# Altium PCB MB1075.PcbDoc (part 3 of 4)
Units mm, origin at the board's own origin, x right, y up, seen from the top; angles counter-clockwise.
Board outline 66 x 119.3 mm, 4 copper layers (TOP, L2, L3, Bottom), stack 1.548 mm thick; 196 components, 219 nets, 897 pads, 500 vias.
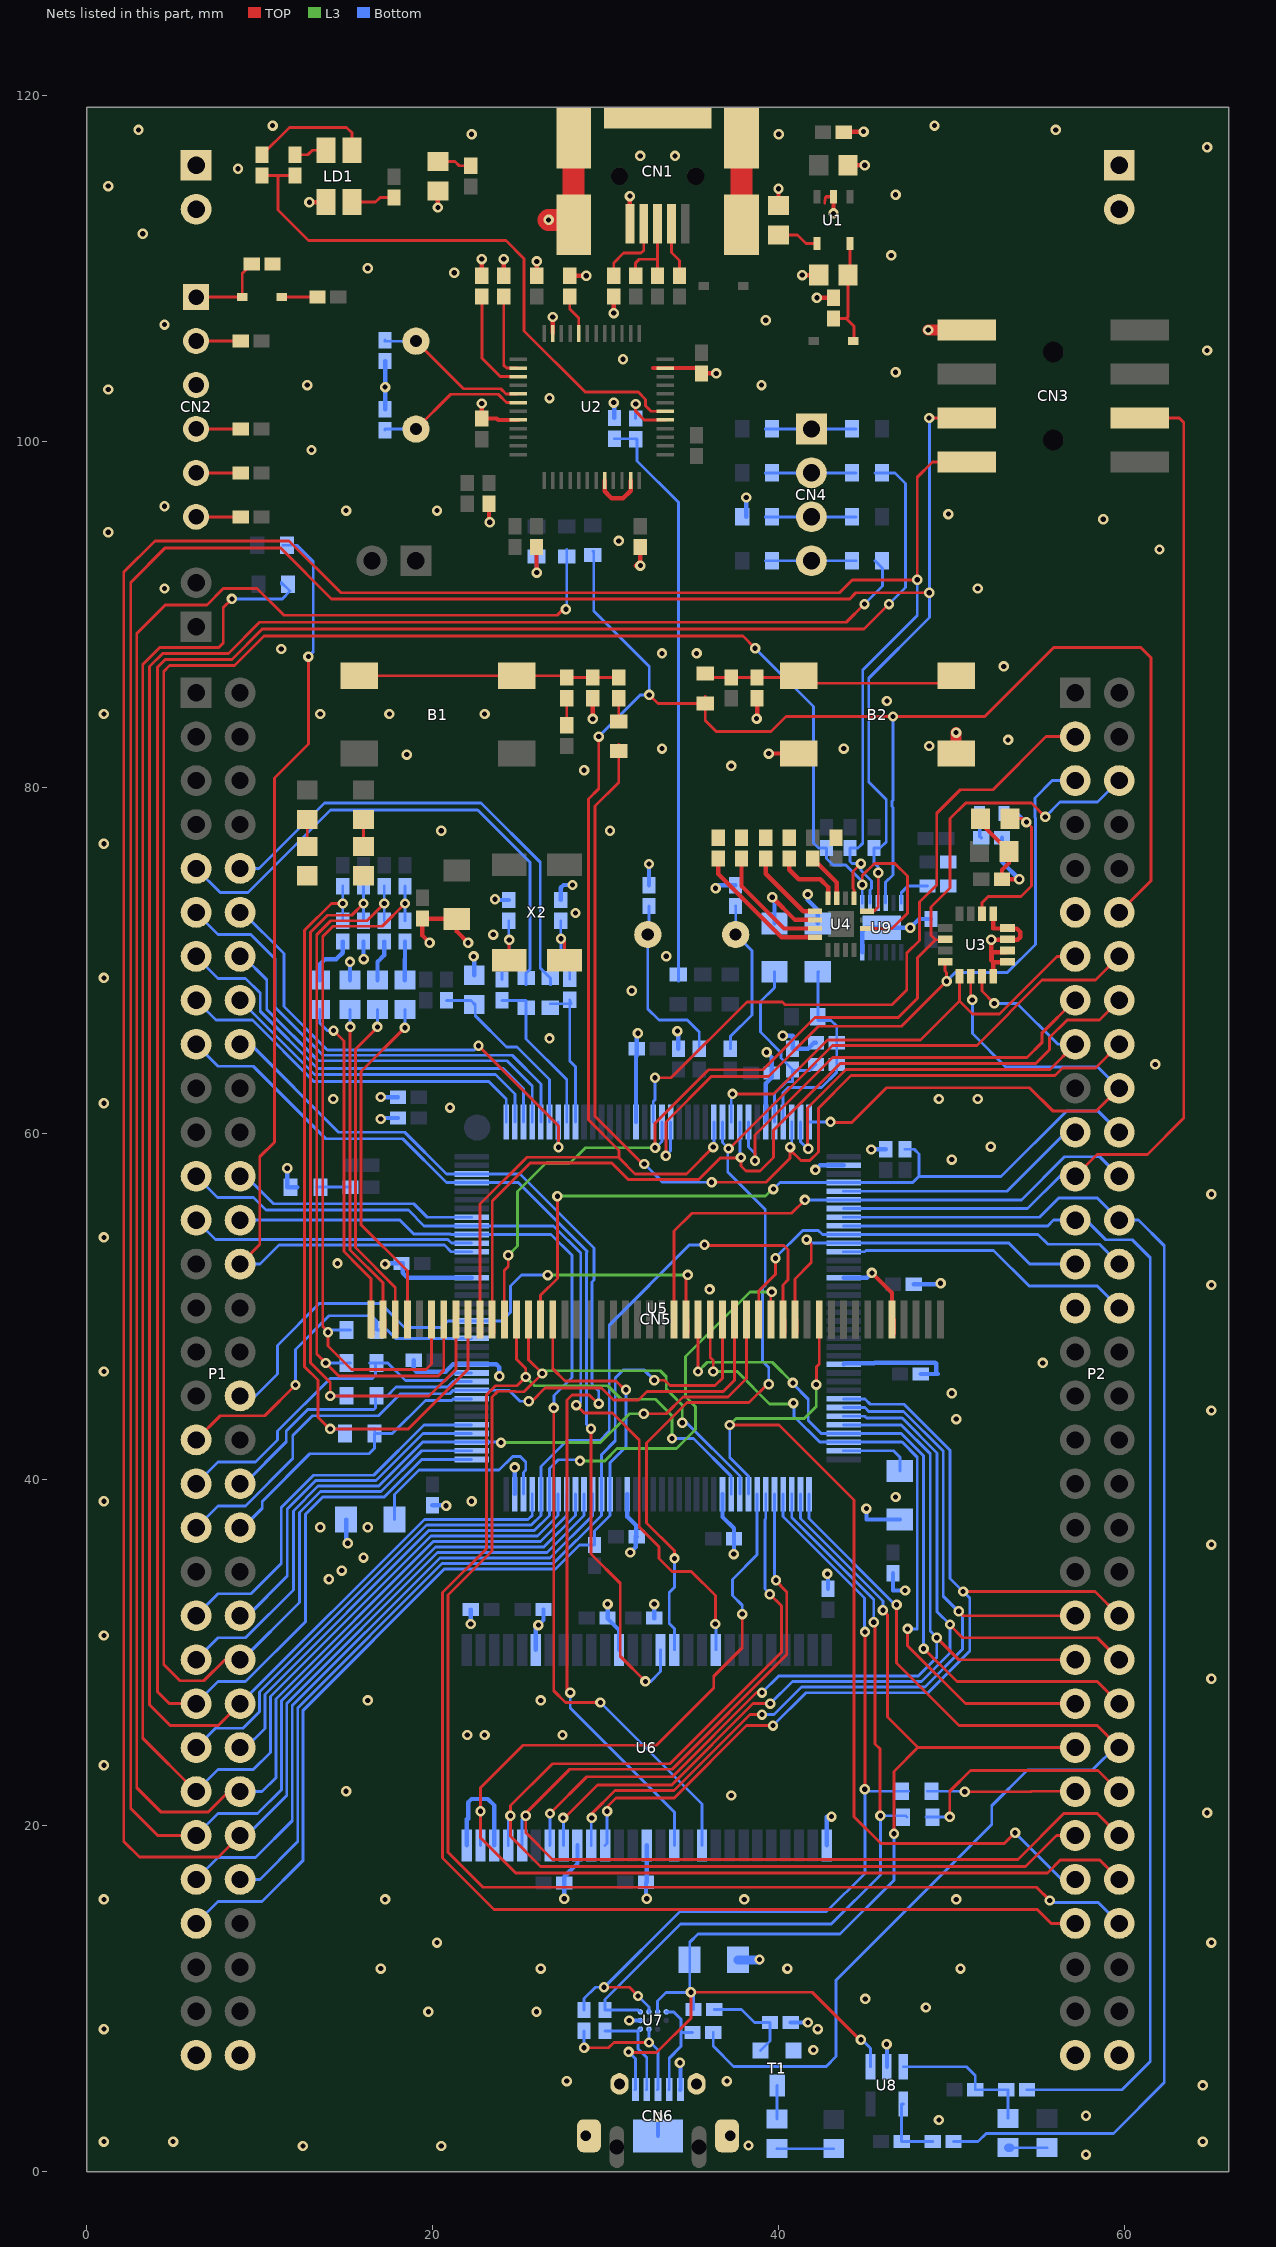
[diagram p4: the nets of this part, all layers, seen from the top]

## Via types
v1: diameter 0.6, hole 0.3, TOP to Bottom, 375 vias
v2: diameter 0.6, hole 0.3, TOP to Bottom, tented both sides, 125 vias

## Nets (pads, with @x,y where several pads share a name; then routed paths per layer and width w, separated by ;. In a path a pad name is that pad's centre, name@x,y a point inside that pad or via, vN(x,y) a via of type N, cw(c..) or ccw(c..) an arc to the next point about the centre after c; other vN are vias at no path point) (continued)
D9: P2.44 U5.65 U6.44 | length 56
  TOP w0.165: v1(30.079,20.837) 30.079,21.091 30.6,21.612 33.963,21.612 38.14,25.79 v1(39.668,25.79) ; v1(50.653,33.537) 58.273,33.537 P2.44@59.67,32.14
  Bottom w0.165: U6.44@29.965,18.87 30.079,18.984 v1(30.079,20.837) ; v1(39.668,25.79) 41.566,27.688 48.614,27.688 51.034,30.108 51.034,33.156 v1(50.653,33.537) 49.9,34.29 49.9,41.7 47.236,44.364 45.289,44.364 44.983,44.67 U5.65@43.75,44.67
D10: P2.43 U5.66 U6.45 | length 52.8
  TOP w0.165: v1(29.19,20.456) 29.19,20.701 30.526,22.037 33.942,22.037 38.33,26.425 v1(39.033,26.425) ; v1(50.399,32.394) 50.653,32.14 P2.43@57.13,32.14
  Bottom w0.165: U6.45@29.165,18.87 29.165,20.431 v1(29.19,20.456) ; v1(39.033,26.425) 39.717,26.425 41.319,28.028 48.446,28.028 50.621,30.203 50.621,32.172 v1(50.399,32.394) 50.367,32.394 49.5,33.261 49.5,41.65 47.199,43.951 45.202,43.951 44.983,44.17 U5.66@43.75,44.17
D11: P2.46 U5.67 U6.47 | length 56.7
  TOP w0.165: v1(27.539,20.456) 27.62,20.456 29.516,22.353 33.812,22.353 38.519,27.06 v1(39.509,27.06) ; v1(49.891,31.632) 49.891,31.6 50.621,30.87 58.4,30.87 P2.46@59.67,29.6
  Bottom w0.165: v1(27.539,20.456) 27.565,20.456 U6.47@27.565,18.87 ; v1(39.509,27.06) 40.792,28.343 48.253,28.343 49.891,29.981 v1(49.891,31.632) 49.15,32.373 49.15,41.55 47.13,43.57 45.065,43.57 44.965,43.67 U5.67@43.75,43.67
D12: P2.45 U5.68 U6.48 | length 54.1
  TOP w0.165: v1(26.777,20.71) 26.809,20.71 26.809,20.743 28.901,22.836 33.849,22.836 38.708,27.695 v1(39.033,27.695) ; v1(49.129,30.87) 50.399,29.6 P2.45@57.13,29.6
  Bottom w0.165: U6.48@26.765,18.87 26.777,18.882 v1(26.777,20.71) ; v1(39.033,27.695) 39.996,28.659 48.061,28.659 49.129,29.727 v1(49.129,30.87) 48.75,31.249 48.75,41.5 47.08,43.17 U5.68@43.75,43.17
D13: P2.54 U5.77 U6.50 | length 68
  TOP w0.165: v1(39.842,34.188) 39.796,34.188 40.463,33.52 40.463,29.895 33.84,23.272 27.925,23.272 25.38,20.728 v1(25.38,20.583) 25.38,19.607 26.93,18.057 53.816,18.057 56.469,20.71 58.4,20.71 P2.54@59.67,19.44
  Bottom w0.165: U6.50@25.165,18.87 25.165,20.368 v1(25.38,20.583) ; U5.77@39.75,39.17 39.75,34.188 v1(39.842,34.188)
D14: P2.53 U5.78 U6.51 | length 66.5
  TOP w0.165: v1(39.473,33.386) 40.148,32.712 40.148,30.025 33.71,23.588 26.915,23.588 24.491,21.164 v1(24.491,20.583) 24.491,19.393 26.226,17.658 54.263,17.658 56.045,19.44 P2.53@57.13,19.44
  Bottom w0.165: U6.51@24.365,18.87 24.365,20.457 v1(24.491,20.583) ; U5.78@39.25,39.17 39.25,37.755 39.198,37.703 39.198,33.676 39.473,33.402 v1(39.473,33.386)
D15: P2.56 U5.79 U6.53 | length 72
  TOP w0.165: v1(37.886,32.235) 37.886,30.286 36.245,28.646 36.245,27.958 32.942,24.655 25.219,24.655 22.765,22.201 v1(22.765,20.837) 22.765,19.313 24.801,17.277 55.523,17.277 56.268,18.022 58.548,18.022 P2.56@59.67,16.9
  Bottom w0.165: U6.53@22.765,18.87 v1(22.765,20.837) ; v1(37.886,32.235) 37.886,32.743 37.325,33.304 37.325,34.24 38.75,35.664 38.75,37.763 U5.79@38.75,39.17
G2: CN5.23 P2.24 U5.42 | length 33.9
  TOP w0.165: CN5.23@33.939,49.256 33.939,54.363 34.976,55.4 40.739,55.4 v1(41.509,56.17) ; CN5.23@34.05,48.43 CN5.23@34.05,49.256
  Bottom w0.165: v1(41.509,56.17) 54.018,56.17 56.51,58.662 58.548,58.662 P2.24@59.67,57.54
G3: CN5.22 P1.34 U5.125 | length 35.2
  TOP w0.165: CN5.22@34.639,49.256 34.639,51.732 v1(34.743,51.835) ; CN5.22@34.75,48.43 CN5.22@34.75,49.256
  L3 w0.165: v1(26.65,51.825) 31.483,51.825 ; 31.483,51.825 34.743,51.825 v1(34.743,51.835)
  Bottom w0.165: P1.34@8.87,44.84 9.759,44.84 11.029,46.11 11.029,47.761 13.442,50.174 16.998,50.174 18.371,48.801 20.514,48.801 20.883,49.17 U5.125@22.25,49.17 23.983,49.17 24.491,49.678 24.491,51.19 25.126,51.825 v1(26.65,51.825)
G4: CN5.21 P2.48 U5.69 | length 43
  TOP w0.165: v1(35.331,46.253) 35.339,46.261 CN5.21@35.339,49.256 ; v1(48.367,30.235) 48.399,30.235 50.304,28.33 58.4,28.33 P2.48@59.67,27.06
  L3 w0.165: v1(35.331,46.253) 35.864,46.786 39.624,46.786 v1(40.813,45.596)
  Bottom w0.165: v1(40.813,45.596) 40.813,45.541 41.704,44.65 41.704,43.421 42.455,42.67 47.08,42.67 48.367,41.383 v1(48.367,30.235)
G5: CN5.20 P2.47 U5.70 | length 39.9
  TOP w0.165: CN5.20@36.039,49.256 36.039,47.066 36.213,46.892 v1(36.213,46.253) ; v1(47.446,31.378) 47.446,30.403 50.789,27.06 P2.47@57.13,27.06
  L3 w0.165: v1(36.213,46.253) 37.597,46.253 39.469,44.381 40.798,44.381 v1(40.846,44.429)
  Bottom w0.165: v1(40.846,44.429) 40.884,44.391 40.884,43.653 42.367,42.17 47.13,42.17 48,41.3 48,31.378 v1(47.446,31.378)
G6: CN5.19 P1.56 U5.97 | length 52.7
  TOP w0.165: v1(32.809,45.745) 33.396,45.745 33.705,45.436 36.322,45.436 36.746,45.86 36.746,49.249 CN5.19@36.739,49.256
  Bottom w0.165: P1.56@8.87,16.9 10.013,16.9 12.201,19.088 12.201,26.813 20.544,35.156 26.969,35.156 29.75,37.937 U5.97@29.75,39.17 29.75,41.446 30.553,42.248 30.553,45.885 31.025,46.357 32.197,46.357 v1(32.809,45.745)
G7: CN5.18 P1.39 U5.117 | length 40
  TOP w0.165: v1(25.55,44.534) 25.734,44.534 26.5,45.3 29.75,45.3 30.45,44.6 31.9,44.6 32.39,45.09 36.017,45.09 36.441,45.09 36.444,45.087 36.776,45.087 37.439,45.75 CN5.18@37.439,49.256
  Bottom w0.165: P1.39@6.33,37.22 7.6,38.49 9.186,38.49 11.918,41.222 11.918,42.554 13.061,43.697 16.871,43.697 18.141,44.967 20.986,44.967 21.189,45.17 U5.117@22.25,45.17 24.415,45.17 25.051,44.534 v1(25.55,44.534)
GND: B2.2 B2.3 C1.1 C2.1 C3.1 C4.1 C5.2 C6.1 C7.1 C8.1 C9.1 C10.1 C12.1 C13.1 C14.2 C15.1 C16.2 C17.2 C18.1 C19.1 C20.2 C21.2 C22.1 C23.2 C24.2 C25.2 C26.2 C27.1 C28.1 C29.1 C30.2 C31.1 C32.1 C33.1 C34.1 C35.1 C36.1 C37.1 C38.1 C39.1 C40.1 C41.2 C42.2 C43.1 C44.1 C45.1 C46.1 C47.1 C48.1 C49.1 C50.1 C51.1 C52.1 C53.2 C55.2 CN1.5 CN1.6 CN2.3 CN3.7 CN5.5 CN6.5 CN6.6 CN6.7 CN6.8 CN6.9 CN6.10 JP1.1 JP1.2 JP2.1 JP2.2 LD1.1 LD2.2 LD3.2 LD4.2 P1.63 P1.64 P2.11 P2.29 P2.63 P2.64 R5.2 R6.1 R7.1 R8.1 R9.2 R19.1 R22.1 R32.2 R33.2 R34.2 R40.1 R41.1 R42.1 R43.1 R44.1 R46.2 R47.1 R48.1 R49.1 R50.1 R55.2 R66.2 R74.1 R75.1 SB7.2 SB10.1 SB21.1 T1.2 U1.2 U2.8 U2.20 U2.23 U2.35 U2.47 U3.8 U3.9 U3.10 U3.11 U3.12 U3.13 U4.10 U5.16 U5.31 U5.38 U5.51 U5.61 U5.83 U5.94 U5.107 U5.120 U5.130 U6.6 U6.12 U6.28 U6.41 U6.46 U6.52 U6.54 U7.D2 U8.2 U9.6 U9.13 | length 196.3
  TOP w0.15: 42.667,113.764 42.667,113.92 42.685,113.938 42.685,114.067 42.747,114.129
  TOP w0.21: 42.753,114.135 U1.2@43.16,114.135
  TOP w0.25: v1(12.876,113.825) LD1.1@13.835,113.825 ; v1(19.824,71.034) 19.406,71.452 C15.1@19.406,72.425 21.378,72.425 C14.2@21.4,72.403 21.4,71.68 v1(22.046,71.034) ; v1(20.3,113.516) LD2.2@20.3,114.475 ; v1(22.84,102.191) C8.1@22.84,101.32 23.703,101.32 23.783,101.24 U2.8@24.94,101.24 ; R6.1@22.84,109.575 v1(22.84,110.534) ; R19.1@23.25,96.4 23.25,95.331 v1(23.3,95.331) ; R7.1@24.11,109.575 v1(24.11,110.534) ; C9.1@26,93.9 26,92.745 26.015,92.73 26.015,92.416 v1(26.009,92.416) ; C4.1@26.015,109.575 v1(26.015,110.4) ; v1(26.937,107.191) 26.94,107.191 U2.47@26.94,106.24 ; R8.1@27.92,109.575 v1(28.879,109.575) ; R22.1@29.25,85.15 29.25,83.962 v1(29.255,83.962) ; U2.20@29.94,97.74 29.94,97.117 30.341,96.716 31.002,96.716 31.44,97.154 U2.23@31.44,97.74 ; v1(30.46,107.416) R9.2@30.46,108.375 ; CN1.5@31.397,112.575 v1(31.397,114.176) ; C10.1@32,93.9 32,92.931 31.85,92.931 31.742,92.823 v1(32.001,92.823) ; 32.742,104.24 U2.35@33.44,104.24 35.23,104.24 C7.1@35.54,103.93 v1(36.391,103.93) ; v1(38.719,83.98) 38.75,83.98 C12.1@38.75,85.15 ; v1(39.422,81.961) 39.423,81.96 B2.2@41.15,81.96 ; v1(39.627,73.659) 40.936,72.35 U4.10@42.1,72.35 ; C3.1@39.985,113.635 v1(39.985,114.594) ; v1(41.351,109.61) C5.2@42.31,109.61 ; v1(42.201,108.305) C6.1@43.16,108.305 ; v1(43.16,113.176) U1.2@43.16,114.135 ; C1.1@43.835,117.9 v1(44.9,117.9) ; C2.1@44.01,115.96 v1(44.969,115.96) ; v1(45.383,51.952) 46.539,50.795 CN5.5@46.539,49.256 ; CN5.5@46.65,48.43 CN5.5@46.65,49.256 ; C19.1@51.65,78.2 51.65,77.95 C13.1@53.3,76.3 53.3,75.64 52.9,75.24 C48.1@52.9,74.7 v1(53.9,74.7) ; U3.8@52.389,69.075 52.389,69.9 ; U3.13@52.39,72.675 52.39,71.85 53.215,71.85 53.75,71.85 53.95,71.65 53.95,71.35 53.8,71.2 v1(52.28,71.2) 52.28,70.1 ; U3.9@53.215,69.9 52.389,69.9 ; U3.10@53.215,70.55 53.152,70.487 52.3,70.487 52.3,70.1 52.28,70.1 ; 52.28,70.1 52.28,70.019 52.389,69.91 52.389,69.9
  TOP w0.635: v1(48.635,106.435) CN3.7@50.86,106.435 ; v1(50.249,83.17) 50.25,83.17 B2.3@50.25,81.96
  TOP w1.27: v1(26.7,112.8) CN1.6@28.147,112.8 ; CN1.6@28.147,112.525 CN1.6@28.147,112.8 ; CN1.6@28.147,117.525 CN1.6@28.147,112.8 ; CN1.6@37.847,112.525 CN1.6@37.847,117.525
  Bottom w0.25: v1(11.6,58) 11.6,56.905 SB21.1@12.18,56.905 ; R47.1@13.474,68.868 13.474,69.764 13.791,70.081 14.426,70.081 14.8,70.455 R41.1@14.8,71.1 ; C42.2@15.003,37.7 15.003,36.331 v1(15.093,36.331) ; R48.1@15.22,68.868 v1(15.22,69.922) ; R42.1@16,71.1 16,70.081 v1(16.014,70.081) ; R49.1@16.808,68.868 16.808,69.922 17.2,70.315 R43.1@17.2,71.1 ; v1(16.998,60.842) 16.998,60.9 C34.1@18,60.9 ; v1(16.998,62.112) 16.998,62.1 C33.1@18,62.1 ; C17.2@17.25,101.85 v1(17.25,103.136) C16.2@17.25,104.65 ; v1(17.252,52.46) 17.252,52.5 C36.1@18.2,52.5 18.268,52.5 18.268,51.952 18.55,51.67 U5.130@22.25,51.67 ; R50.1@18.395,68.868 18.395,70.081 18.4,70.081 R44.1@18.4,71.1 ; C38.1@18.906,46.904 18.906,46.393 19.053,46.246 20.754,46.246 21.178,46.67 U5.120@22.25,46.67 23.677,46.67 23.856,46.491 v1(23.856,45.983) ; C40.1@19.983,38.525 20.776,38.525 v1(20.776,38.49) ; U6.54@21.965,18.87 21.965,20.392 22.046,20.392 22.046,21.352 22.247,21.553 23.184,21.553 23.565,21.173 U6.52@23.565,18.87 ; C46.1@22.2,32.5 22.2,31.664 v1(22.205,31.664) ; v1(22.364,70.24) 22.4,70.24 C28.1@22.4,69.15 ; v1(23.602,73.542) 23.602,73.5 C23.2@24.4,73.5 ; v1(24.745,40.712) 24.75,40.712 U5.107@24.75,39.17 ; U6.6@25.965,30.17 25.965,31.505 26.015,31.505 v1(26.11,31.6) 26.4,31.89 C47.1@26.4,32.5 ; SB10.1@26,93.75 26,92.416 v1(26.009,92.416) ; C24.2@27.4,73.5 27.4,74.209 27.559,74.367 v1(28.079,74.367) ; v1(27.603,15.789) 27.6,15.789 C51.1@27.6,16.7 27.6,17.056 28.365,17.821 U6.46@28.365,18.87 ; v1@30.107,32.812 30.107,31.981 30.765,31.324 U6.12@30.765,30.17 ; v1(30.46,102.24) 30.46,102.229 30.5,102.189 C18.1@30.5,101.35 ; U5.94@31.25,39.17 31.25,37.859 31.763,37.346 C43.1@31.763,36.737 ; v1(31.357,8.75) U7.D2@32,8.75 ; v1(31.413,35.791) 31.73,36.109 31.73,36.718 31.756,36.744 C43.1@31.763,36.737 ; U5.16@31.75,60.67 31.75,64.464 31.8,64.514 C29.1@31.8,64.9 31.8,65.795 v1(31.857,65.795) ; C43.1@31.8,36.7 C43.1@31.763,36.737 ; v1(32.365,15.789) 32.33,15.789 C52.1@32.33,16.741 32.365,16.741 U6.41@32.365,18.87 ; C20.2@32.5,74.35 v1@32.5,75.582 ; C27.1@32.806,31.981 v1(32.806,32.812) ; CN6.10@33.02,2.085 v1(33.02,3.175) ; v1(34.143,65.922) 34.2,65.922 R55.2@34.2,64.9 ; v1(34.288,6.309) 34.32,6.278 CN6.5@34.32,4.76 ; CN6.5@34.3,4.75 CN6.5@34.3,4.76 ; v1(36.347,74.174) 36.523,74.35 C21.2@37.5,74.35 ; U5.83@36.75,39.17 36.75,37.85 37.41,37.19 C44.1@37.41,36.585 37.41,35.7 v1(37.4,35.7) ; SB7.2@38.115,95.64 v1(38.115,96.755) ; U5.31@39.25,60.67 39.25,62.902 39.6,63.252 39.6,64.398 v1(39.298,64.7) ; C25.2@39.75,72.147 39.75,73.347 ; v1(40.229,65.653) 40.8,65.653 C30.2@40.8,64.9 41.687,64.9 42.037,65.25 C31.1@42.15,65.25 ; R66.2@40.693,8.633 v1(41.681,8.633) ; v1(41.675,73.824) 41.675,73.496 42.25,72.922 C26.2@42.25,72.147 ; v1(42.114,57.904) 42.381,58.17 U5.38@43.75,58.17 ; U6.28@42.765,18.87 42.765,20.53 v1(43.045,20.53) ; v1(42.809,34.56) 42.843,34.56 C50.1@42.843,33.692 ; U5.61@43.75,46.67 43.804,46.724 45.512,46.724 45.554,46.766 49.045,46.766 49.098,46.713 49.098,46.204 49.193,46.11 C39.1@48.205,46.11 ; U5.51@43.75,51.67 45.1,51.67 v1(45.383,51.952) ; U9.6@44.825,70.475 44.825,71.682 45.043,71.9 v1(47.6,71.9) 48.1,72.4 C55.2@48.797,72.4 ; v1(45.065,38.331) 45.065,37.703 C41.2@47,37.703 ; v1(45.345,59.081) 45.345,59.093 C35.1@46.176,59.092 ; v1(46.232,7.378) 46.25,7.378 U8.2@46.25,6.075 ; C45.1@46.6,34.6 46.6,33.6 v1(47.3,33.6) ; C37.1@47.8,51.3 49.351,51.3 v1(49.351,51.349) ; R75.1@52.9,77.1 52.9,75.7 v1(53.9,74.7)
  Bottom w0.5: C53.2@37.647,12.25 38.886,12.25 v1(38.886,12.277)
  other v1: 41.998,7.046 30.107,32.812 32.5,75.582 18.5,81.9 48.7,82.4
  other v2: 57.75,1 12.5,1.5 20.5,1.5 38.25,1.524 1,1.75 5,1.75 64.5,1.75 49.25,3 57.75,3.25 64.5,5 27.75,5.25 37,5.25 1,8.25 42.25,8.25 19.75,9.25 26,9.25 48.5,9.5 45,10 17,11.75 26.25,11.75 40.5,11.75 50.5,11.75 20.25,13.25 65,13.25 1,15.75 17.25,15.75 38,15.75 50.25,15.75 64.75,20.75 37.25,21.75 15,22 1,23.5 22,25.25 23,25.25 27.5,25.25 16.25,27.25 26.25,27.25 65,28.5 1,31 14,34.25 14.75,34.75 16,35.5 65,36.25 13.5,37.25 16.25,37.25 1,38.75 22.25,38.75 46.75,39 50.25,43.5 65,44 50,45 1,46.25 55.25,46.75 36,51 65,51.25 14.5,52.5 1,54 65,56.5 50,58.5 52.25,59.25 21,61.5 1,61.75 14.25,62 49.25,62 51.5,62 61.75,64 26.75,65.5 31.5,68.25 1,69 33.5,70.25 23.5,71.5 28.25,72.75 1,76.75 20.5,77.5 30.25,77.5 28.75,81 37.25,81.25 33.25,82.25 43.75,82.25 53.25,82.75 1,84.25 13.5,84.25 17.5,84.25 23,84.25 46.25,85 53,87 33.25,87.75 35.25,87.75 11.25,88 4.5,91.5 51.5,91.5 62,93.75 30.75,94.25 1.25,94.75 58.75,95.5 49.8,95.8 15,96 20.25,96 4.5,96.25 13,99.5 26.75,102.5 1.25,103 12.75,103.25 39,103.25 46.75,104 31,104.75 64.75,105.25 4.5,106.75 39.25,107 21.25,109.75 16.25,110 46.5,110.75 3.25,112 46.75,114.25 1.25,114.75 8.75,115.75 32,116.5 34,116.5 64.75,117 22.25,117.75 40,117.75 3,118 56,118 10.75,118.25 49,118.25
IM0: CN5.40 R35.1 R41.2 SB25.2 | length 47.7
  TOP w0.165: v1(14.8,73.3) 14.152,73.3 12.6,71.747 12.6,46.524 13.371,45.752 13.371,43.613 14.049,42.935 v1(14.077,42.935) 18.588,42.935 22.034,46.382 CN5.40@22.034,49.261
  Bottom w0.165: v1(14.077,42.935) SB25.2@15.255,42.935 ; R41.2@14.8,72.3 v1(14.8,73.3) R35.1@14.8,74.3
IM1: CN5.41 R36.1 R42.2 SB24.2 | length 45.1
  TOP w0.165: v1(16,73.3) 15.321,72.621 13.919,72.621 12.95,71.652 12.95,46.751 14.077,45.624 v1(14.077,44.84) 19.793,44.84 21.339,46.387 CN5.41@21.339,49.256
  Bottom w0.165: v1(14.077,44.84) SB24.2@15.255,44.84 ; R42.2@16,72.3 16,73.002 15.912,73.09 15.912,73.3 v1(16,73.3) R36.1@16,74.3
IM2: CN5.42 R37.1 R43.2 SB23.2 | length 43.3
  TOP w0.165: v1(17.2,73.3) 16.204,72.304 14.109,72.304 13.3,71.495 13.3,47.268 v1(13.823,46.745) 14.585,45.983 20.3,45.983 20.639,46.322 CN5.42@20.639,49.256
  Bottom w0.165: v1(13.823,46.745) SB23.2@15.255,46.745 ; R43.2@17.2,72.3 v1(17.2,73.3) R37.1@17.2,74.3
IM3: CN5.43 R38.1 R44.2 SB22.2 | length 42
  TOP w0.165: v1(18.4,73.3) 17.086,71.986 14.237,71.986 13.65,71.399 13.65,48.846 13.95,48.546 v1(13.95,48.523) 13.95,47.718 15.304,46.364 19.615,46.364 19.939,46.688 CN5.43@19.939,49.256
  Bottom w0.165: v1(13.95,48.523) 13.95,48.65 SB22.2@15.255,48.65 ; R44.2@18.4,72.3 v1(18.4,73.3) R38.1@18.4,74.3
LED_STLINK: R1.1 R2.1 U2.30 | length 33.8
  TOP w0.165: R1.1@10.14,115.36 11.063,115.36 ; R2.1@12.045,115.36 11.063,115.36 ; U2.30@33.44,101.74 32.622,101.74 32.304,102.058 32.304,102.43 31.883,102.85 28.812,102.85 25.286,106.376 25.286,110.556 24.238,111.604 12.823,111.604 11.063,113.364 11.063,115.36
MCO: C18.2 R28.2 SB18.1 | length 33.7
  Bottom w0.165: C18.2@30.5,100.15 31.774,100.15 R28.2@31.804,100.12 ; R28.2@31.73,100.12 R28.2@31.804,100.12 ; SB18.1@34.2,68.8 34.2,96.48 31.804,98.876 R28.2@31.804,100.12
NetB1_2: B1.2 B1.3 C11.1 R22.2 R23.2 | length 15.1
  TOP w0.165: B1.3@15.75,86.46 B1.2@24.85,86.46 27.75,86.46 C11.1@27.75,86.35 R22.2@29.25,86.35 R23.2@30.75,86.35
NetB2_1: B2.1 B2.4 C12.2 R24.1 SB1.2 | length 15.4
  TOP w0.165: SB1.2@35.75,86.35 R24.1@37.25,86.35 C12.2@38.75,86.35 B2.1@41.15,86.35 ; B2.1@41.15,86.46 B2.1@41.15,86.35 ; B2.4@50.25,86.46 50.25,86.026 41.15,86.026 B2.1@41.15,86.35
NetC3_2: C3.2 U1.4 | length 2.4
  TOP w0.165: C3.2@39.985,111.935 41.075,111.935 41.575,111.435 U1.4@42.21,111.435
NetC5_1: C5.1 C6.2 D3.1 U1.5 | length 6.8
  TOP w0.165: C6.2@43.16,107.105 43.9,107.105 ; U1.5@44.11,111.435 44.11,109.61 C5.1@44.01,109.61 44.01,107.215 43.9,107.105 ; D3.1@44.303,105.8 44.35,105.8 44.35,106.655 43.9,107.105
NetC11_2: C11.2 R25.1 | length 1.5
  TOP w0.165: R25.1@27.75,83.6 C11.2@27.75,85.15
NetC19_2: C19.2 C54.2 U3.14 | length 10.3
  TOP w0.165: U3.14@51.74,72.7 51.74,73.34 52.1,73.7 54,73.7 54.6,74.3 54.6,77.709 v1(54.309,78) 54.109,78.2 C19.2@53.35,78.2
  Bottom w0.165: C54.2@53.004,78.5 53.809,78.5 v1(54.309,78)
NetC20_1: C20.1 R56.2 X3.2 | length 10.5
  Bottom w0.165: C20.1@32.5,73.15 32.5,71.505 X3.2@32.429,71.505 32.429,67.199 33.072,66.557 34.711,66.557 35.4,65.868 R56.2@35.4,64.9
NetC21_1: C21.1 R57.2 X3.1 | length 9.2
  Bottom w0.165: R57.2@37.2,64.9 37.2,65.602 38.448,66.85 38.448,70.567 X3.1@37.509,71.505 37.509,73.15 C21.1@37.5,73.15
NetC23_1: C23.1 R53.2 X2.4 | length 4.8
  TOP w0.165: X2.4@24.415,70.03 24.415,71.192 v1(24.428,71.192)
  Bottom w0.165: R53.2@24,68.9 24,69.984 24.428,70.411 v1(24.428,71.192) 24.4,71.192 C23.1@24.4,72.3
NetC24_1: C24.1 R54.2 X2.1 | length 5.1
  TOP w0.165: v1(27.412,71.256) 27.412,71.307 27.615,71.307 X2.1@27.615,70.03
  Bottom w0.165: C24.1@27.4,72.3 27.4,71.256 v1(27.412,71.256) 27.412,70.272 27.92,69.764 R54.2@27.92,68.935
NetC25_1: C25.1 C30.1 R58.2 U5.32 | length 11.9
  Bottom w0.165: U5.32@39.75,60.67 39.75,62.32 40.427,62.997 40.8,62.997 C30.1@40.8,63.646 ; C25.1@39.75,69.353 39.75,68.433 38.942,67.624 38.942,65.871 40.137,64.676 40.137,64.363 C30.1@40.8,63.7 C30.1@40.8,63.646 ; R58.2@42.15,64 41.796,63.646 C30.1@40.8,63.646
NetC26_1: C26.1 C31.2 L1.2 R58.1 U5.33 | length 12.1
  Bottom w0.165: U5.33@40.25,60.67 40.25,62.375 40.547,62.672 42.477,62.672 43.35,63.544 R58.1@43.35,64 C31.2@43.35,65.25 43.35,66.209 43.02,66.538 42.262,66.538 L1.2@42.262,66.75 42.262,69.302 42.3,69.34 42.3,69.353 C26.1@42.25,69.353
NetC28_2: C28.2 R52.1 U5.6 | length 10.7
  Bottom w0.165: R52.1@20.8,67.7 22.205,67.7 C28.2@22.459,67.446 ; C28.2@22.4,67.45 22.459,67.45 C28.2@22.459,67.446 ; U5.6@26.75,60.67 26.75,63.128 24.877,65.001 24.269,65.001 22.459,66.811 C28.2@22.459,67.446
NetC41_1: C41.1 U5.71 | length 4.2
  Bottom w0.165: U5.71@43.75,41.67 46.63,41.67 47,41.3 C41.1@47,40.497
NetC42_1: C42.1 U5.106 | length 12
  Bottom w0.165: C42.1@17.797,37.7 17.797,39.151 19.2,40.554 23.833,40.554 24.627,41.347 25.063,41.347 25.38,41.03 25.38,40.554 25.25,40.424 U5.106@25.25,39.17
NetC54_1: C54.1 R75.2 | length 1.4
  Bottom w0.21: C54.1@51.604,78.5 51.604,77.196 R75.2@51.7,77.1
NetCN1_2: CN1.2 R12.1 | length 3.2
  TOP w0.165: CN1.2@33.797,112.575 33.797,110.925 34.27,110.452 R12.1@34.27,109.575
NetCN1_3: CN1.3 R10.1 R11.1 | length 5.1
  TOP w0.165: R10.1@31.73,109.575 31.73,110.319 31.936,110.524 32.997,110.524 ; CN1.3@32.997,112.575 32.997,110.524 ; R11.1@33,109.575 32.997,109.575 32.997,110.524
NetCN1_4: CN1.4 R9.1 | length 4.3
  TOP w0.165: R9.1@30.46,109.575 30.46,110.317 31.026,110.883 32.041,110.883 32.197,111.039 CN1.4@32.197,112.575
NetCN2_1: CN2.1 D1.1 R5.1 | length 4.8
  TOP w0.165: CN2.1@6.33,108.34 D1.1@8.997,108.34 8.997,109.702 R5.1@9.54,110.245
NetCN2_2: CN2.2 R14.1 | length 2.6
  TOP w0.165: CN2.2@6.33,105.8 R14.1@8.905,105.8
NetCN2_4: CN2.4 R15.1 | length 2.6
  TOP w0.165: CN2.4@6.33,100.72 R15.1@8.905,100.72
NetCN2_5: CN2.5 R17.1 | length 2.6
  TOP w0.165: CN2.5@6.33,98.18 R17.1@8.905,98.18
NetCN2_6: CN2.6 R20.1 | length 2.6
  TOP w0.165: CN2.6@6.33,95.64 R20.1@8.905,95.64
NetCN4_1: CN4.1 SB3.1 SB4.2 | length 5.2
  Bottom w0.165: SB3.1@39.215,100.72 CN4.1@41.89,100.72 SB4.2@44.465,100.72
NetCN4_2: CN4.2 SB5.1 SB6.2 | length 5.2
  Bottom w0.165: SB5.1@39.215,98.18 CN4.2@41.89,98.18 SB6.2@44.465,98.18
NetCN4_3: CN4.3 SB7.1 SB8.2 | length 5.2
  Bottom w0.165: SB7.1@39.215,95.64 CN4.3@41.89,95.64 SB8.2@44.465,95.64
NetCN4_4: CN4.4 SB13.1 SB14.2 | length 5.2
  Bottom w0.165: SB13.1@39.215,93.1 CN4.4@41.89,93.1 SB14.2@44.465,93.1
NetCN5_45: CN5.45 R50.2 | length 20.9
  TOP w0.165: v1(18.395,66.112) 18.383,66.112 15.855,63.584 15.855,54.736 18.539,52.052 CN5.45@18.539,49.256 ; CN5.45@18.65,48.43 CN5.45@18.65,49.256
  Bottom w0.165: v1(18.395,66.112) R50.2@18.395,67.167
NetCN5_46: CN5.46 R49.2 | length 20.2
  TOP w0.165: v1(16.808,66.167) 16.808,66.143 15.538,64.873 15.538,53.412 17.839,51.111 CN5.46@17.839,49.256 ; CN5.46@17.95,48.43 CN5.46@17.95,49.256
  Bottom w0.165: v1(16.808,66.167) R49.2@16.808,67.167
NetCN5_47: CN5.47 R48.2 | length 19.6
  TOP w0.165: v1(15.239,66.167) 15.222,66.167 15.222,53.278 17.139,51.361 CN5.47@17.139,49.256 ; CN5.47@17.25,48.43 CN5.47@17.25,49.256
  Bottom w0.165: R48.2@15.22,67.167 15.22,66.167 v1(15.239,66.167)
NetCN5_48: CN5.48 R47.2 | length 20.2
  TOP w0.165: v1(14.268,65.954) 14.868,65.353 14.868,53.182 15.775,52.275 16.439,51.611 CN5.48@16.439,49.256 ; CN5.48@16.55,48.43 CN5.48@16.55,49.256
  Bottom w0.165: R47.2@13.474,67.167 13.474,66.385 13.905,65.954 v1(14.268,65.954)
NetCN6_2: CN6.2 R64.2 U7.D1 | length 5.7
  Bottom w0.165: R64.2@29.96,8.15 U7.D1@31.9,8.15 ; U7.D1@32,8.25 U7.D1@31.9,8.15 ; CN6.2@32.35,4.75 CN6.2@32.35,4.76 ; CN6.2@32.37,4.76 32.37,6.616 31.865,7.121 31.865,8.115 U7.D1@31.9,8.15
NetCN6_3: CN6.3 R63.2 U7.C1 | length 8.6
  TOP w0.165: v1(28.75,7.176) 30.169,7.176 30.473,7.48 v1(32.5,7.48)
  Bottom w0.165: v1(28.75,7.176) R63.2@28.75,8.15 ; U7.C1@32.5,8.25 32.5,7.561 33.02,7.041 CN6.3@33.02,4.76 ; CN6.3@33,4.75 CN6.3@33,4.76
NetCN6_4: CN6.4 R67.2 U7.A3 | length 6
  Bottom w0.165: U7.A3@33.5,9.25 33.933,9.25 34.339,8.843 34.339,8.05 ; CN6.4@33.65,4.75 CN6.4@33.65,4.76 ; CN6.4@33.67,4.76 33.67,6.57 34.339,7.239 34.339,8.05 ; R67.2@35.009,8.05 34.339,8.05
NetD1_2: D1.2 R13.1 | length 2.1
  TOP w0.165: D1.2@11.283,108.34 R13.1@13.35,108.34
NetLD1_2: LD1.2 R2.2 | length 1.9
  TOP w0.165: R2.2@12.045,116.56 12.782,116.56 13.047,116.825 LD1.2@13.835,116.825
NetLD1_3: LD1.3 R1.2 | length 7
  TOP w0.165: R1.2@10.14,116.56 11.724,118.144 15.028,118.144 15.335,117.837 LD1.3@15.335,116.825
NetLD1_4: LD1.4 R3.1 | length 2.5
  TOP w0.165: LD1.4@15.335,113.825 16.701,113.825 16.966,114.09 R3.1@17.76,114.09
NetLD2_1: LD2.1 R4.1 | length 2
  TOP w0.165: LD2.1@20.3,116.175 21.282,116.175 21.532,115.925 R4.1@22.205,115.925
NetLD3_1: LD3.1 R26.2 | length 1.5
  TOP w0.165: LD3.1@12.75,76.6 R26.2@12.75,78.15
NetLD4_1: LD4.1 R27.2 | length 1.5
  TOP w0.165: LD4.1@16,76.6 R27.2@16,78.15
NetLD5_1: LD5.1 R70.1 | length 3.3
  Bottom w0.165: LD5.1@39.9,1.35 39.9,1.34 R70.1@43.175,1.34
NetLD5_2: LD5.2 T1.3 | length 1.9
  Bottom w0.165: LD5.2@39.9,3.05 39.9,4.984 T1.3@39.913,4.984
NetLD6_1: LD6.1 R73.1 | length 2.3
  Bottom w0.165: LD6.1@53.374,1.4 R73.1@55.5,1.4
  Bottom w0.5: LD6.1@53.25,1.4 LD6.1@53.374,1.4
NetLD6_2: LD6.2 R68.1 R69.1 U8.3 | length 8.7
  Bottom w0.165: U8.3@47.2,6.075 50.839,6.075 51.35,5.564 R68.1@51.35,4.75 R69.1@53.15,4.75 53.25,4.75 LD6.2@53.25,3.1
NetP2_51: P2.51 SB26.2 | length 8.6
  TOP w0.165: v1(50.751,21.967) 54.58,21.967 54.613,22 57.13,22 P2.51@57.13,21.98
  Bottom w0.165: SB26.2@48.6,22 50.751,22 v1(50.751,21.967)
NetP2_52: P2.52 SB27.1 | length 13.7
  TOP w0.165: v1(49.878,20.518) 49.878,21.996 51.088,23.206 58.444,23.206 P2.52@59.67,21.98
  Bottom w0.165: SB27.1@48.5,20.5 49.878,20.5 v1(49.878,20.518)
NetR6_2: R6.2 U2.3 | length 6.1
  TOP w0.165: R6.2@22.84,108.375 22.84,104.811 23.911,103.74 U2.3@24.94,103.74
NetR7_2: R7.2 U2.2 | length 4.9
  TOP w0.165: R7.2@24.11,108.375 24.11,104.4 24.27,104.24 U2.2@24.94,104.24
NetR8_2: R8.2 U2.44 | length 2.4
  TOP w0.165: R8.2@27.92,108.375 27.92,107.654 28.44,107.134 U2.44@28.44,106.24
NetR23_1: R23.1 SB2.2 | length 1.5
  TOP w0.165: SB2.2@30.75,83.6 R23.1@30.75,85.15
NetR28_1: R28.1 U2.29 | length 3.2
  TOP w0.165: v1(31.73,102.163) 31.73,101.738 32.228,101.24 U2.29@33.44,101.24
  Bottom w0.165: R28.1@31.73,101.32 v1(31.73,102.163)
NetR31_2: R31.2 U4.7 | length 2.9
  TOP w0.25: R31.2@41.965,75.9 43.35,74.515 U4.7@43.35,73.6
NetR32_1: R32.1 U4.8 | length 4
  TOP w0.25: R32.1@40.6,75.9 40.6,75.249 41.149,74.7 42.4,74.7 42.85,74.25 U4.8@42.85,73.6
NetR33_1: R33.1 U4.9 | length 4.6
  TOP w0.25: R33.1@39.25,75.9 39.25,75.015 41.415,72.85 U4.9@42.1,72.85
NetR34_1: R34.1 U4.11 | length 6.9
  TOP w0.25: R34.1@37.847,75.9 37.847,74.301 40.298,71.85 U4.11@42.1,71.85
NetR46_1: R46.1 U4.12 | length 8
  TOP w0.25: R46.1@36.5,75.9 36.5,75.005 40.155,71.35 U4.12@42.1,71.35
NetR61_1: R61.1 SB21.2 | length 2
  Bottom w0.165: SB21.2@13.28,56.905 R61.1@15.255,56.905
NetR65_1: R65.1 R66.1 T1.1 | length 5.4
  Bottom w0.165: R65.1@36.275,9.385 37.849,9.385 38.6,8.633 R66.1@39.493,8.633 39.493,7.562 T1.1@38.947,7.016
NetR71_1: R71.1 R72.2 U8.4 | length 4.1
  Bottom w0.165: U8.4@47.2,3.925 47.1,3.925 R71.1@47.1,1.75 R72.2@48.9,1.75
NetR74_2: R74.2 U9.12 | length 2.3
  Bottom w0.165: U9.12@47.075,73.325 47.075,73.922 47.453,74.3 R74.2@48.6,74.3
NRST: CN5.39 P2.12 SB1.1 SB12.2 U5.25 U9.10 | length 123.3
  TOP w0.165: CN5.39@22.739,49.256 22.739,55.928 25.449,58.638 30.734,58.638 30.772,58.6 ; CN5.39@22.85,48.43 CN5.39@22.85,49.256 ; v1(29.6,82.94) 29.6,79.928 29,79.328 29,60.8 30.772,59.028 30.772,58.6 ; v1(32.511,85.353) 33.014,84.85 SB1.1@35.75,84.85 ; SB1.1@35.75,85.25 SB1.1@35.75,84.85 ; v1(36.217,59.219) 34.67,57.672 31.7,57.672 30.772,58.6 ; P2.12@59.67,72.78 61.5,74.61 61.5,87.5 60.9,88.1 55.9,88.1 51.9,84.1 v1(46.6,84.1) 40.421,84.1 39.559,83.237 36.384,83.237 35.75,83.872 SB1.1@35.75,84.85
  Bottom w0.165: SB12.2@29.25,93.65 29.308,93.65 29.308,90.196 32.511,86.993 v1(32.511,85.353) ; v1(29.6,82.94) 31.998,85.338 v1@32.496,85.338 ; v1(36.217,59.219) 36.179,59.219 36.25,59.29 U5.25@36.25,60.67 ; U9.10@46.175,73.325 46.175,74.528 46.6,74.953 46.6,78.852 46.542,78.909 46.542,79.206 46.6,79.263 46.6,84 46.5,84.1 v1(46.6,84.1)
OSC_IN: C16.1 U2.5 X1.2 | length 9
  TOP w0.165: X1.2@19.035,105.791 21.786,103.04 23.935,103.04 24.235,102.74 U2.5@24.94,102.74
  Bottom w0.165: C16.1@17.25,105.85 17.25,105.791 X1.2@19.035,105.791
OSC_OUT: C17.1 U2.6 X1.1 | length 8.8
  TOP w0.165: X1.1@19.035,100.711 21.048,102.724 23.791,102.724 24.275,102.24 U2.6@24.94,102.24
  Bottom w0.165: C17.1@17.25,100.65 17.25,100.711 X1.1@19.035,100.711
PA0: P2.18 SB2.1 U5.34 | length 61.2
  TOP w0.165: SB2.1@30.75,82.5 30.75,80.287 29.385,78.922 29.385,61.001 32.144,58.243 v1(32.222,58.243) ; v1(36.117,57.188) 39.261,57.188 40.652,58.58 v1@40.652,59.063 ; v1(40.652,59.219) v1@40.652,59.063 ; P2.18@59.67,65.16 58.308,63.798 56.4,63.798 55.952,63.35 44.178,63.35 42.293,61.466 42.293,58.944 41.79,58.441 41.275,58.441 v1@40.652,59.063
  Bottom w0.165: v1(32.222,58.243) 32.237,58.243 33.292,57.188 v1(36.117,57.188) ; v1(40.652,59.219) 40.75,59.219 U5.34@40.75,60.67
PA1: P2.17 U3.7 U5.35 | length 28.6
  TOP w0.165: v1(41.7,59.127) 41.658,59.127 41.658,61.475 43.883,63.7 55.67,63.7 P2.17@57.13,65.16 ; U3.7@51.74,69.075 51.74,68.241 v1(52.455,67.527)
  Bottom w0.165: U5.35@41.25,60.67 41.25,59.527 41.65,59.127 v1(41.7,59.127) ; v1(52.455,67.527) 53.773,67.527 56.14,65.16 P2.17@57.13,65.16
PA2: P2.20 U3.6 U5.36 | length 33.3
  TOP w0.165: v1(42.99,60.679) 42.99,60.642 44.219,60.642 46.227,62.65 54.494,62.65 55.828,61.316 58.366,61.316 P2.20@59.67,62.62 ; U3.6@51.09,69.075 51.09,67.669 51.185,67.574 v1(51.185,67.726)
  Bottom w0.165: U5.36@41.75,60.67 42.208,60.67 42.99,60.67 v1(42.99,60.679) ; v1(51.185,67.726) 51.185,65.792 53.138,63.839 58.451,63.839 P2.20@59.67,62.62
PA4: CN5.34 P2.22 R60.1 U5.40 | length 45.6
  TOP w0.165: CN5.34@26.239,49.256 26.239,50.661 27.205,51.627 v1(27.205,56.383) ; CN5.34@26.35,48.43 CN5.34@26.35,49.256
  L3 w0.165: v1(27.205,56.383) 27.219,56.397 39.223,56.397 39.617,56.791 v1(39.69,56.791)
  Bottom w0.165: v1(39.69,56.791) 40.069,57.17 47.745,57.17 48.09,57.516 ; R60.1@47.288,59.092 47.831,59.093 48.1,58.824 48.1,57.525 48.09,57.516 ; P2.22@59.67,60.08 58.434,61.316 56.646,61.316 52.846,57.516 48.09,57.516
PA5: P2.21 U5.41 | length 14.8
  Bottom w0.165: U5.41@43.75,56.67 53.185,56.67 56.595,60.08 P2.21@57.13,60.08
PA7: CN3.4 P2.23 U5.43 | length 64.7
  TOP w0.165: P2.23@57.13,57.54 58.39,58.8 61.3,58.8 63.4,60.9 63.4,101.1 63.145,101.355 CN3.4@60.86,101.355
  Bottom w0.165: U5.43@43.75,55.67 54.372,55.67 56.242,57.54 P2.23@57.13,57.54
PA8: CN3.3 P1.53 R30.1 U4.4 U5.100 U9.9 | length 192.5
  TOP w0.165: P1.53@6.33,19.44 4.11,19.44 2.55,21 2.55,91.85 4.55,93.85 11.2,93.85 14.15,90.9 44.1,90.9 44.45,91.25 v1(48.7,91.25) ; U4.4@45.1,72.85 45.5,72.85 45.748,73.098 v1(45.748,75.077) ; v1(48.688,101.355) CN3.3@50.86,101.355
  Bottom w0.165: P1.53@6.33,19.44 7.6,20.71 9.886,20.71 11.254,22.078 11.254,27.203 20.16,36.109 26.421,36.109 28.25,37.937 U5.100@28.25,39.17 ; U9.9@45.725,73.325 45.748,73.348 v1(45.748,75.077) ; 45.748,75.402 45.5,75.65 R30.1@45.5,76.5 45.85,76.5 46.208,76.858 46.208,79.31 45.2,80.318 45.2,86.315 48.7,89.815 v1(48.7,91.25) 48.7,101.343 v1(48.688,101.355)
PA9: P1.52 SB11.1 U5.101 | length 133.3
  TOP w0.165: P1.52@8.87,21.98 8.214,21.98 7.022,20.788 4.312,20.788 2.9,22.2 2.9,88.904 4.546,90.55 6.95,90.55 7.9,91.5 9.857,91.5 11.407,89.95 27.2,89.95 27.55,90.3 v1(27.7,90.3)
  Bottom w0.165: P1.52@8.87,21.98 10.14,21.98 10.939,22.779 10.939,27.333 20.032,36.426 26.239,36.426 27.75,37.937 U5.101@27.75,39.17 ; v1(27.7,90.3) 27.75,90.3 SB11.1@27.75,93.75
PA10: P1.51 SB15.1 U5.102 | length 109.3
  TOP w0.165: P1.51@6.33,21.98 3.25,25.06 3.25,87.1 4.25,88.1 7.65,88.1 7.9,88.35 7.9,90.4 v1(8.4,90.9)
  Bottom w0.165: P1.51@6.33,21.98 7.6,23.25 9.632,23.25 10.623,24.241 10.623,27.463 19.903,36.744 26.056,36.744 27.25,37.937 U5.102@27.25,39.17 ; v1(8.4,90.9) 11.312,90.9 11.758,91.347 11.25,91.855 SB15.1@11.25,91.75
PA11: CN5.15 P1.50 U5.103 | length 50.2
  TOP w0.165: CN5.15@39.539,49.256 39.539,50.791 v1(39.599,50.851) ; CN5.15@39.65,48.43 CN5.15@39.65,49.256
  L3 w0.165: v1(28.516,41.089) 29.945,41.089 30.656,41.8 34.085,41.8 35.185,42.9 35.185,44.216 34.601,44.8 34.601,47.12 38.332,50.851 v1(39.599,50.851)
  Bottom w0.165: P1.50@8.87,24.52 9.195,24.52 10.308,25.632 10.308,27.593 19.775,37.061 25.874,37.061 26.75,37.937 U5.103@26.75,39.17 26.75,40.649 27.258,41.157 28.447,41.157 v1(28.516,41.089)
PA12: CN5.14 P1.49 U5.104 | length 57.3
  TOP w0.165: v1(35.706,53.573) 35.706,53.531 40.302,53.531 40.535,53.298 40.535,51.551 40.239,51.255 CN5.14@40.239,49.256 ; CN5.14@40.35,48.43 CN5.14@40.35,49.256
  Bottom w0.165: P1.49@6.33,24.52 7.452,25.642 9.038,25.642 9.992,26.596 9.992,27.724 19.647,37.379 25.691,37.379 26.25,37.937 26.25,40.757 27.754,42.261 29.667,42.261 30.206,42.799 30.206,48.929 34.85,53.573 v1(35.706,53.573)
PA13: P1.48 SB14.1 U5.105 | length 134.8
  TOP w0.165: P1.48@8.87,27.06 7.611,25.801 4.833,25.801 3.643,26.992 3.643,86.993 4.4,87.75 8.2,87.75 10,89.55 43.903,89.55 v1(44.953,90.6)
  Bottom w0.165: P1.48@8.87,27.06 8.883,27.06 19.519,37.696 25.509,37.696 25.75,37.937 U5.105@25.75,39.17 ; v1(44.953,90.6) 46,91.647 46,92.665 SB14.1@45.565,93.1
PA14: P1.47 SB6.1 U5.109 | length 140.3
  TOP w0.165: P1.47@6.33,27.06 4.779,27.06 4.108,27.731 4.108,86.958 4.55,87.4 8.4,87.4 10.15,89.15 44.922,89.15 v1(46.372,90.6)
  Bottom w0.165: P1.47@6.33,27.06 7.6,28.33 9.186,28.33 12.65,31.794 12.65,38 13.65,39 17.201,39 19.371,41.17 U5.109@22.25,41.17 ; SB6.1@45.565,98.18 46.723,98.18 47.33,97.573 47.33,91.559 v1(46.372,90.6)
PA15: P1.46 R45.1 U4.2 U5.110 U9.7 | length 146
  TOP w0.165: P1.46@8.87,29.6 7.992,29.6 6.771,28.379 5.399,28.379 4.462,29.316 4.462,86.712 4.8,87.05 8.55,87.05 10.25,88.75 37.925,88.75 v1(38.629,88.046) ; v1(44.825,74.375) 44.825,74.908 45.527,75.61 46.701,75.61 47.433,74.878 47.433,72.733 46.55,71.85 U4.2@45.1,71.85
  Bottom w0.165: P1.46@8.87,29.6 8.999,29.6 12.3,32.901 12.3,38.1 13.2,39 13.515,39.315 17.018,39.315 19.373,41.67 U5.110@22.25,41.67 ; v1(38.629,88.046) 41.998,84.677 41.998,76.792 42.29,76.5 R45.1@42.76,76.5 42.76,75.89 43.125,75.525 43.869,75.525 44.825,74.569 U9.7@44.825,73.325
PB0: CN5.16 P2.28 U5.46 | length 26.1
  TOP w0.165: CN5.16@38.839,49.256 38.839,50.898 39.81,51.869 v1(39.81,52.792) ; CN5.16@38.95,48.43 CN5.16@38.95,49.256
  Bottom w0.165: v1(39.81,52.792) 39.81,52.832 41.388,54.41 42.278,54.41 42.517,54.17 54.982,54.17 55.549,53.603 58.527,53.603 P2.28@59.67,52.46
PB1: CN5.13 P2.27 U5.47 | length 22.1
  TOP w0.165: CN5.13@40.939,49.256 40.939,51.606 41.878,52.544 41.878,53.607 v1(41.608,53.877) ; CN5.13@41.05,48.43 CN5.13@41.05,49.256
  Bottom w0.165: v1(41.608,53.877) 41.608,53.884 41.822,53.67 53.291,53.67 54.501,52.46 P2.27@57.13,52.46
PB2: P2.30 U5.48 | length 17.3
  Bottom w0.165: U5.48@43.75,53.17 44.956,53.17 45.04,53.254 52.407,53.254 54.471,51.19 58.4,51.19 P2.30@59.67,49.92
PB3: P1.28 SB9.2 U5.133 | length 58.5
  TOP w0.165: P1.28@8.87,52.46 10.01,53.6 10.01,58.66 10.85,59.5 10.85,80.55 12.818,82.518 v1(12.818,87.565)
  Bottom w0.165: P1.28@8.87,52.46 10.013,52.46 11.115,53.562 20.675,53.562 21.067,53.17 U5.133@22.25,53.17 ; SB9.2@11.35,94 12.149,94 13.1,93.049 13.1,87.847 v1(12.818,87.565)
PB4: P1.25 U5.134 | length 16.5
  Bottom w0.165: P1.25@6.33,55 7.452,53.878 20.873,53.878 21.081,53.67 U5.134@22.25,53.67
PB5: P1.26 U5.135 U6.37 | length 59.3
  TOP w0.165: v1(27,44.152) 27,27.807 27.679,27.128 v1(29.692,27.128)
  Bottom w0.165: P1.26@8.87,55 18.101,55 18.908,54.193 21.03,54.193 21.053,54.17 U5.135@22.25,54.17 26.845,54.17 28.047,52.968 28.047,45.9 27.019,44.871 27.019,44.152 v1(27,44.152) ; v1(29.692,27.128) 35.565,21.255 U6.37@35.565,18.87
PB6: P1.23 U5.136 U6.19 | length 52.2
  TOP w0.165: v1(28.297,44.309) 28.3,44.309 28.759,43.85 30.39,43.85 31.94,42.3 31.94,37.265 33.083,36.122 33.083,35.441 33.828,34.696 34.938,34.696 36.334,33.3 v1(36.334,31.664)
  Bottom w0.165: P1.23@6.33,57.54 7.57,56.3 9.646,56.3 10.37,55.576 18.599,55.576 19.505,54.67 U5.136@22.25,54.67 26.98,54.67 28.555,53.095 28.555,44.506 28.357,44.309 v1(28.297,44.309) ; v1(36.334,31.664) 36.334,31.727 36.365,31.696 U6.19@36.365,30.17
PB7: P1.24 U5.137 | length 14.4
  Bottom w0.165: P1.24@8.87,57.54 9.21,57.54 10.801,55.949 18.906,55.949 19.685,55.17 U5.137@22.25,55.17
PB12: P2.50 R67.1 U5.73 | length 62.5
  TOP w0.165: v1(46.811,32.775) 46.811,29.4 50.421,25.79 58.4,25.79 P2.50@59.67,24.52
  Bottom w0.165: R67.1@36.209,8.05 36.209,7.28 37.39,6.1 42.744,6.1 43.316,6.672 43.316,11.076 52.309,20.069 52.309,21.16 54.37,23.221 58.112,23.221 59.541,24.649 P2.50@59.67,24.52 ; U5.73@41.75,39.17 41.75,37.75 46.725,32.775 v1(46.811,32.775)
PB13: C53.1 CN6.1 P2.49 R65.2 U5.74 U7.B3 U8.1 | length 76.2
  TOP w0.165: v1(31.323,6.938) 31.331,6.931 31.3,6.9 32.936,6.9 34.919,8.883 v1(34.919,10.384) 41.936,10.384 44.677,7.642 v1(44.747,7.642) ; v1(46.018,32.457) 46.275,32.2 46.275,26.29 48.045,24.52 ; v1(46.658,19.537) 46.658,23.144 48.034,24.52 48.045,24.52 ; P2.49@57.13,24.52 48.045,24.52
  Bottom w0.165: v1(31.323,6.938) 31.72,6.541 CN6.1@31.72,4.76 ; CN6.1@31.7,4.75 CN6.1@31.7,4.76 ; U7.B3@33,9.25 33,9.885 33.489,10.375 v1@34.91,10.375 ; R65.2@35.075,9.385 35.075,10.384 v1(34.919,10.384) v1@34.91,10.375 ; U5.74@41.25,39.17 41.25,37.764 46.018,32.996 v1(46.018,32.457) ; v1(44.747,7.642) 44.8,7.642 45.3,7.142 U8.1@45.3,6.075 ; v1(46.658,19.537) 46.658,16.858 43.54,13.741 35.324,13.741 34.853,13.27 C53.1@34.853,12.25 34.853,10.317 v1@34.91,10.375
PB14: R64.1 SB27.2 U5.75 U7.D3 | length 47.3
  TOP w0.165: v1(45.488,31.763) 45.5,31.763 45.563,31.7 45.563,24.737 45.859,24.441 45.859,20.582 v1(45.869,20.582)
  Bottom w0.165: U7.D3@32,9.25 31.9,9.35 R64.1@29.96,9.35 29.96,9.96 34.328,14.328 43.031,14.328 45.869,17.167 v1(45.869,20.582) 47.318,20.582 SB27.2@47.4,20.5 ; U5.75@40.75,39.17 40.75,37.818 45.484,33.084 45.484,31.763 v1(45.488,31.763)
PB15: R63.1 SB26.1 U5.76 U7.C3 | length 49.9
  TOP w0.165: v1(29.9,10.668) 31.366,10.668 v1(31.865,10.168) ; v1(44.973,22.115) 44.983,22.115 v1(44.983,31.207)
  Bottom w0.165: R63.1@28.75,9.35 28.75,10.018 29.4,10.668 v1(29.9,10.668) 29.918,10.668 34.291,15.041 42.76,15.041 44.973,17.254 v1@44.973,22 ; v1(31.865,10.168) 32.5,9.533 U7.C3@32.5,9.25 ; U5.76@40.25,39.17 40.25,37.873 44.955,33.168 44.955,31.107 44.983,31.079 v1(44.983,31.207) ; v1(44.973,22.115) v1@44.973,22 ; SB26.1@47.5,22 v1@44.973,22
PC0: P2.14 U5.26 U6.16 | length 65
  TOP w0.165: v1(33.976,35.454) 33.976,35.893 32.365,37.504 32.365,42.12 34.704,44.459 36.18,44.459 36.182,44.457 38.277,44.457 39.339,45.52 v1(39.424,45.52) ; v1(37.103,59.143) 37.143,59.143 43.1,65.1 51.45,65.1 55.219,68.869 58.299,68.869 P2.14@59.67,70.24
  Bottom w0.165: U6.16@33.965,30.17 33.977,30.17 33.977,31.392 33.675,31.694 33.675,33.481 33.977,33.783 v1(33.976,35.454) ; U5.26@36.75,60.67 36.75,59.489 v1@37.048,59.191 ; v1(37.103,59.143) 37.103,59.136 v1@37.048,59.191 ; v1(39.424,45.52) 39.424,46.49 39.219,46.695 39.066,46.848 39.066,51.071 39.219,51.224 39.219,55.61 37.048,57.781 v1@37.048,59.191
PC1: P2.13 U3.5 U5.27 | length 26.8
  TOP w0.165: v1(37.327,62.293) 39.703,62.293 42.824,65.415 48.186,65.415 50.44,67.669 ; U3.5@50.44,69.075 50.44,67.669 ; P2.13@57.13,70.24 56.071,70.24 52.75,66.919 51.19,66.919 50.44,67.669
  Bottom w0.165: U5.27@37.25,60.67 37.25,62.293 v1(37.327,62.293)
PC2: CN5.38 P2.16 U5.28 | length 53.8
  TOP w0.165: CN5.38@23.439,49.256 23.439,56.106 25.636,58.303 30.347,58.303 31.297,57.353 35.378,57.353 36.625,58.6 v1@37.811,58.6 ; CN5.38@23.55,48.43 CN5.38@23.55,49.256 ; v1(37.811,58.618) v1@37.811,58.6 ; P2.16@59.67,67.7 58.536,66.566 56.671,66.566 55.65,65.545 55.65,64.85 54.85,64.05 43.55,64.05 39.691,60.191 39.691,58.612 38.917,57.839 38.106,57.839 37.811,58.134 v1@37.811,58.6
  Bottom w0.165: U5.28@37.75,60.67 37.75,58.679 v1(37.811,58.618)
PC3: P2.15 U5.29 | length 25.9
  TOP w0.165: v1(38.627,58.43) 38.627,59.927 43.1,64.4 54.35,64.4 55.2,65.25 55.2,65.803 57.083,67.687 57.083,67.7 P2.15@57.13,67.7
  Bottom w0.165: U5.29@38.25,60.67 38.25,59.228 38.627,58.851 v1(38.627,58.43)
PC4: P2.26 R72.1 U5.44 | length 82.1
  Bottom w0.165: U5.44@43.75,55.17 55.075,55.17 56.175,56.27 58.4,56.27 P2.26@59.67,55 60.796,55 62.273,53.523 62.273,5.16 59.34,2.228 51.991,2.228 51.513,1.75 R72.1@50.1,1.75
PC5: P2.25 R69.2 U5.45 | length 73
  Bottom w0.165: U5.45@43.75,54.67 55.543,54.67 55.873,55 P2.25@57.13,55 57.193,54.937 57.822,54.937 58.894,53.865 60.425,53.865 61.467,52.824 61.467,6.375 59.842,4.75 R69.2@54.35,4.75
PC6: CN5.33 P1.57 R62.1 U5.96 | length 54.5
  TOP w0.165: CN5.33@26.939,49.256 26.939,46.411 27.65,45.7 30.6,45.7 31.1,45.2 v1(31.171,45.2)
  Bottom w0.165: P1.57@6.33,14.36 7.6,15.63 10.14,15.63 12.516,18.006 12.516,26.683 20.672,34.839 27.097,34.839 28.491,36.233 R62.1@29.349,36.232 29.349,37.036 30.25,37.937 30.25,40.985 31.171,41.905 v1(31.171,45.2)
PC8: P1.55 U5.98 | length 36.8
  Bottom w0.165: P1.55@6.33,16.9 7.6,18.17 9.759,18.17 11.885,20.296 11.885,26.943 20.418,35.476 26.789,35.476 29.25,37.937 U5.98@29.25,39.17
PC9: CN3.1 P1.54 R29.1 U4.5 U5.99 U9.8 | length 194
  TOP w0.165: P1.54@8.87,19.44 7.63,18.2 3.05,18.2 2.15,19.1 2.15,92.45 3.95,94.25 11.7,94.25 14.7,91.25 43.5,91.25 44.25,92 v1(48,92) 48,97.929 48.886,98.815 CN3.1@50.86,98.815 ; U4.5@44.292,73.658 U4.5@44.35,73.6 44.35,74.097 44.292,74.154 44.292,75.146 v1(44.747,75.6)
  Bottom w0.165: P1.54@8.87,19.44 8.87,19.4 8.9,19.4 9.055,19.245 11.57,21.759 11.57,27.073 20.288,35.791 26.604,35.791 28.75,37.937 U5.99@28.75,39.17 ; U9.8@45.275,73.325 45.275,74.072 45.358,74.154 45.358,74.596 44.747,75.207 v1(44.747,75.6) 44.24,75.6 44.11,75.729 R29.1@44.11,76.5 44.575,76.5 44.85,76.775 44.85,86.794 48,89.944 v1(48,92)
PC10: CN5.17 P1.45 U5.111 | length 44.7
  TOP w0.165: v1(32.2,43.811) 33.495,43.811 34.459,44.775 36.31,44.775 36.313,44.772 37.063,44.772 38.139,45.848 CN5.17@38.139,49.256
  L3 w0.165: v1(23.951,42.141) 29.7,42.141 31.369,43.811 v1(32.2,43.811)
  Bottom w0.165: P1.45@6.33,29.6 7.6,30.87 9.186,30.87 11.95,33.634 11.95,38.2 13.38,39.63 16.887,39.63 19.427,42.17 U5.111@22.25,42.17 23.951,42.17 v1(23.951,42.141)
PC11: P1.44 U5.112 | length 20
  Bottom w0.165: P1.44@8.87,32.14 9.313,32.14 11.6,34.427 11.6,38.3 13.245,39.945 16.721,39.945 19.446,42.67 U5.112@22.25,42.67
PC12: P1.43 U5.113 | length 22.4
  Bottom w0.165: P1.43@6.33,32.14 7.6,33.41 9.505,33.41 11.25,35.155 11.25,38.4 12.85,40 12.854,40 13.115,40.26 16.59,40.26 19.5,43.17 U5.113@22.25,43.17
PC13: P1.12 U5.7 | length 28.2
  TOP w0.165: v1(22.648,65.075) 27.273,60.449 v1(27.273,59.213)
  Bottom w0.165: P1.12@8.87,72.78 9.02,72.78 11.402,70.398 11.402,67.351 13.912,64.84 22.414,64.84 v1(22.648,65.075) ; U5.7@27.25,60.67 27.25,59.213 v1(27.273,59.213)
PC14: P1.9 SB16.1 | length 30.3
  Bottom w0.165: P1.9@6.33,75.32 7.727,73.923 9.323,73.923 14.1,78.7 22.6,78.7 25.634,75.666 25.634,69.503 25.4,69.269 SB16.1@25.4,68.6
PC14-OSC32_IN: R53.1 SB16.2 U5.8 | length 9.4
  Bottom w0.165: R53.1@24,67.7 25.4,67.7 25.4,67.5 25.4,65.469 27.75,63.119 U5.8@27.75,60.67
PC15: P1.10 SB17.1 | length 27.7
  Bottom w0.165: P1.10@8.87,75.32 8.898,75.348 8.898,75.32 9.963,75.32 13.743,79.1 22.8,79.1 26.216,75.684 26.216,69.564 26.8,68.98 SB17.1@26.8,68.6
PC15-OSC32_OUT: R54.1 SB17.2 U5.9 | length 8.6
  Bottom w0.165: SB17.2@26.8,67.5 28,67.5 R54.1@27.92,67.735 27.92,64.197 28.25,63.867 U5.9@28.25,60.67
PD2: P1.40 SB25.1 U5.116 | length 17.8
  Bottom w0.165: P1.40@8.87,37.22 9.02,37.22 10.15,38.35 10.15,38.75 12.9,41.5 16.32,41.5 16.639,41.819 SB25.1@16.639,42.67 SB25.1@16.65,42.67 ; SB25.1@16.355,42.935 16.65,42.935 SB25.1@16.65,42.67 ; U5.116@22.25,44.67 21.189,44.67 21.105,44.586 19.579,44.586 17.663,42.67 SB25.1@16.65,42.67
PD4: P1.38 SB24.1 U5.118 | length 16.9
  Bottom w0.165: P1.38@8.87,39.76 9.107,39.76 11.537,42.19 11.537,42.808 12.779,44.05 16.6,44.05 16.7,44.15 SB24.1@16.7,44.84 ; SB24.1@16.355,44.84 SB24.1@16.7,44.84 ; U5.118@22.25,45.67 21.189,45.67 20.867,45.348 17.887,45.348 17.379,44.84 SB24.1@16.7,44.84
PD5: P1.37 SB23.1 U5.119 | length 20.5
  Bottom w0.165: P1.37@6.33,39.76 7.6,41.03 9.759,41.03 11.029,42.3 11.029,42.808 14.077,45.856 16.506,45.856 16.7,46.05 SB23.1@16.7,46.745 ; SB23.1@16.355,46.745 SB23.1@16.7,46.745 ; U5.119@22.25,46.17 21.189,46.17 20.748,45.729 18.421,45.729 17.405,46.745 SB23.1@16.7,46.745
PD7: P1.35 SB22.1 U5.123 | length 21.9
  TOP w0.165: P1.35@6.33,42.3 7.727,43.697 10.292,43.697 v1(12.07,45.475)
  Bottom w0.165: v1(12.07,45.475) 12.07,47.532 14.016,49.478 16.472,49.478 16.6,49.35 ; SB22.1@16.355,48.65 16.6,48.65 16.6,49.35 ; U5.123@22.25,48.17 17.859,48.17 17.379,48.65 SB22.1@16.744,48.65 16.744,49.206 16.6,49.35
PD11: CN5.11 P2.55 U5.80 | length 57.1
  TOP w0.165: v1(37.17,43.164) 40.016,43.164 44.345,38.835 44.345,20.523 45.9,18.968 53.027,18.968 v1(53.656,19.598) ; v1(42.169,45.498) 42.189,45.519 42.189,46.533 42.339,46.683 CN5.11@42.339,49.256
  L3 w0.165: v1(37.17,43.164) 37.534,43.528 41.468,43.528 42.169,44.229 v1(42.169,45.498)
  Bottom w0.165: v1(37.17,43.164) 37.17,41.278 38.25,40.198 U5.80@38.25,39.17 ; v1(53.656,19.598) 56.354,16.9 P2.55@57.13,16.9
PD12: CN5.35 P2.58 U5.81 | length 90.9
  TOP w0.165: CN5.35@25.539,49.256 25.539,46.932 v1(26.337,46.135) 25.284,45.082 24.779,45.082 24.745,45.116 23.76,45.116 23.419,44.775 23.419,35.877 20.882,33.341 20.882,18.476 22.906,16.452 54.901,16.452 55.655,15.698 v1(55.655,15.682)
  L3 w0.165: v1(26.337,46.135) 26.502,46.3 33.15,46.3 33.5,45.95 33.5,45.25 34.423,44.327 v1(34.423,43.296)
  Bottom w0.165: v1(34.423,43.296) 34.675,43.296 37.75,40.22 U5.81@37.75,39.17 ; v1(55.655,15.682) 55.77,15.567 58.463,15.567 P2.58@59.67,14.36
PD13: CN5.36 P2.57 U5.82 | length 88.2
  TOP w0.165: CN5.36@24.839,49.256 24.839,46.963 25.378,46.424 v1(25.378,45.934) 24.875,45.431 23.629,45.431 23.103,44.905 23.103,36.015 20.567,33.479 20.567,18.149 23.55,15.166 54.937,15.166 55.743,14.36 P2.57@57.13,14.36
  L3 w0.165: v1(25.378,45.934) 25.881,45.431 30.119,45.431 30.9,44.65 32.883,44.65 33.833,43.7 v1(33.833,42.382)
  Bottom w0.165: v1(33.833,42.382) 35.07,42.382 37.25,40.202 U5.82@37.25,39.17
PE0: P1.17 U5.141 U6.15 | length 56.2
  TOP w0.165: v1(29.146,42.94) 29.146,35.715 30.839,34.021 30.839,29.8 v1(32.293,28.346)
  Bottom w0.165: P1.17@6.33,65.16 7.6,63.89 9.632,63.89 13.823,59.699 18.268,59.699 20.797,57.17 U5.141@22.25,57.17 24.948,57.17 28.936,53.182 28.892,53.138 28.892,43.194 28.936,43.15 v1(29.146,42.94) ; v1(32.293,28.346) 32.6,28.346 33.165,28.911 U6.15@33.165,30.17
PE1: P1.18 U5.142 U6.39 | length 65
  TOP w0.165: v1(27.947,27.699) 27.761,27.885 27.761,44.611 28.05,44.9 29.05,44.9 29.55,44.4 v1(29.6,44.4)
  Bottom w0.165: P1.18@8.87,65.16 9.482,65.16 14.562,60.08 18.388,60.08 20.798,57.67 U5.142@22.25,57.67 25.045,57.67 29.317,53.398 29.317,51.541 29.207,51.431 29.207,45.528 29.6,45.135 v1(29.6,44.4) ; v1(27.947,27.699) 27.947,26.8 33.965,20.782 U6.39@33.965,18.87
PE2: P1.15 U5.1 | length 21.6
  Bottom w0.165: P1.15@6.33,67.7 7.473,66.557 9.589,66.557 13.145,63.001 23.253,63.001 24.25,62.004 U5.1@24.25,60.67
PE3: P1.16 U5.2 | length 19.7
  Bottom w0.165: P1.16@8.87,67.7 8.891,67.7 13.177,63.414 23.634,63.414 24.75,62.297 U5.2@24.75,60.67
PE4: P1.13 U5.3 | length 24.6
  Bottom w0.165: P1.13@6.33,70.24 7.6,68.97 9.186,68.97 10.034,68.122 10.034,67.066 13.337,63.763 24.078,63.763 25.25,62.591 U5.3@25.25,60.67
PE5: P1.14 U5.4 | length 23.1
  Bottom w0.165: P1.14@8.87,70.24 9.06,70.24 10.411,68.889 10.411,67.18 13.384,64.207 24.29,64.207 25.75,62.747 U5.4@25.75,60.67
PE6: P1.11 U5.5 | length 27.9
  Bottom w0.165: P1.11@6.33,72.78 7.6,71.51 9.49,71.51 10.902,70.098 10.902,67.283 13.66,64.525 24.599,64.525 26.25,62.874 U5.5@26.25,60.67
PF6: P2.3 U5.18 | length 40.1
  TOP w0.165: v1(32.848,63.225) 33.773,63.225 38.156,67.608 40.209,67.608 40.367,67.45 46.55,67.45 47.393,68.293 47.393,70.427 48.133,71.167 48.133,73.378 49.129,74.375 49.129,78.514 50.485,79.87 52.37,79.87 55.44,82.94 P2.3@57.13,82.94
  Bottom w0.165: U5.18@32.75,60.67 32.75,61.862 32.848,61.96 v1(32.848,63.225)
PF7: CN5.37 P2.6 U3.2 U5.19 | length 62.1
  TOP w0.165: CN5.37@24.139,49.256 24.139,52.086 24.364,52.311 v1(24.364,52.968) ; CN5.37@24.25,48.43 CN5.37@24.25,49.256 ; v1(32.852,59.184) 32.852,60.602 35.943,63.693 39.093,63.693 42.1,66.7 46.9,66.7 48.023,67.823 48.023,70.166 49.057,71.2 ; U3.2@49.615,71.2 49.057,71.2 ; v1(55.4,78.3) 54.6,79.1 50.801,79.1 49.9,78.199 49.9,74.2 48.797,73.097 48.797,71.46 49.057,71.2
  L3 w0.165: v1(24.364,52.968) 24.91,53.514 24.91,56.661 26.541,58.292 27.941,58.292 28.832,59.184 v1(32.852,59.184)
  Bottom w0.165: v1(32.852,59.184) 32.852,59.154 33.25,59.553 U5.19@33.25,60.67 ; v1(55.4,78.3) 56.255,79.155 58.425,79.155 P2.6@59.67,80.4
PF8: P2.5 U3.4 U5.20 | length 42
  TOP w0.165: v1(33.477,58.719) 33.477,60.677 36.1,63.3 39.4,63.3 42.3,66.2 47.1,66.2 v1(49.7,68.8) 49.7,69.315 49.615,69.4 U3.4@49.615,69.9
  Bottom w0.165: v1(33.477,58.719) 33.75,58.991 U5.20@33.75,60.67 ; v1(49.7,68.8) 50.2,69.3 53.2,69.3 54.8,70.9 54.842,70.942 54.842,78.221 54.8,78.262 54.8,79.4 55.8,80.4 P2.5@57.13,80.4